# Altium PCB PCB1_AUTO.PcbDoc
Units mm, origin at the board's own origin, x right, y up, seen from the top; angles counter-clockwise.
Board outline 68.58 x 53.34 mm, 2 copper layers (Top Layer, Bottom Layer); 40 components, 28 nets, 191 pads, 26 vias.
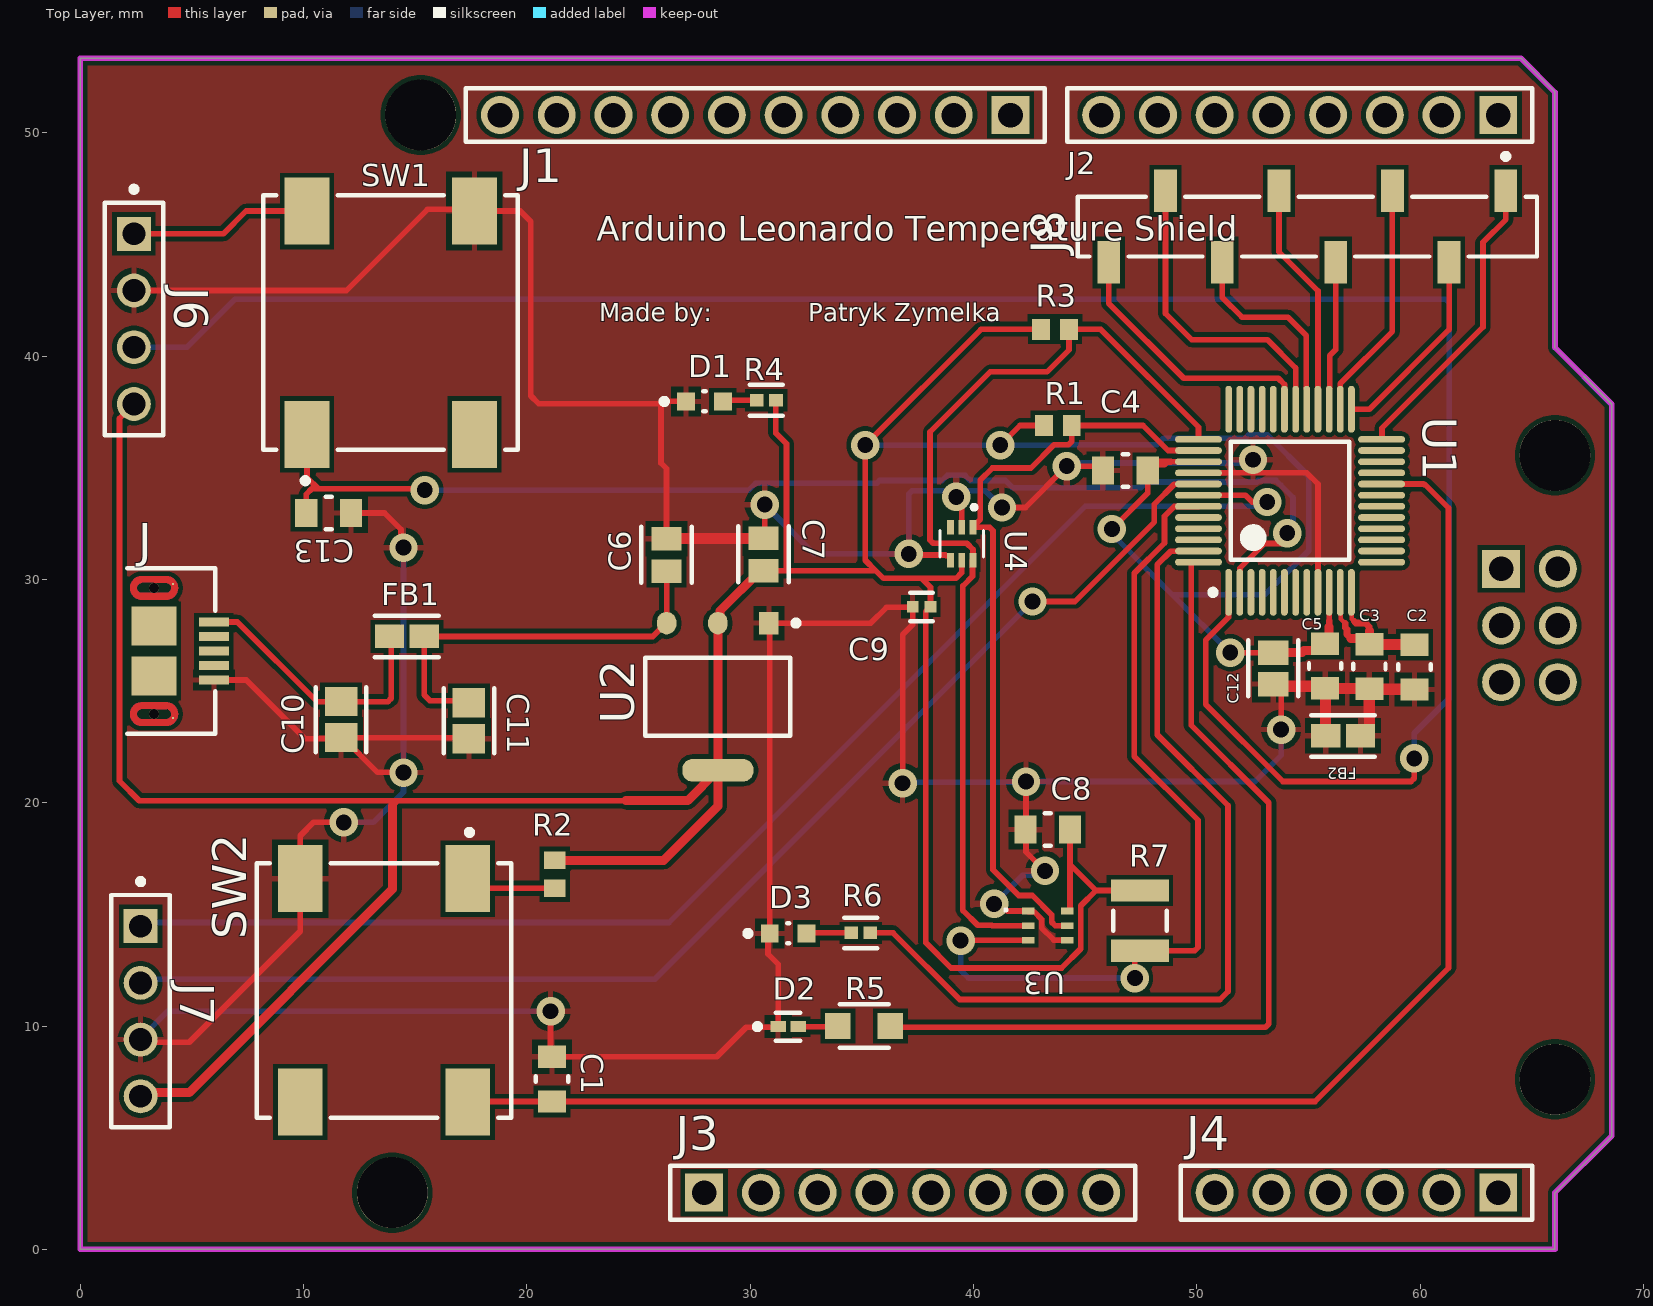
[diagram p0: Top Layer view]
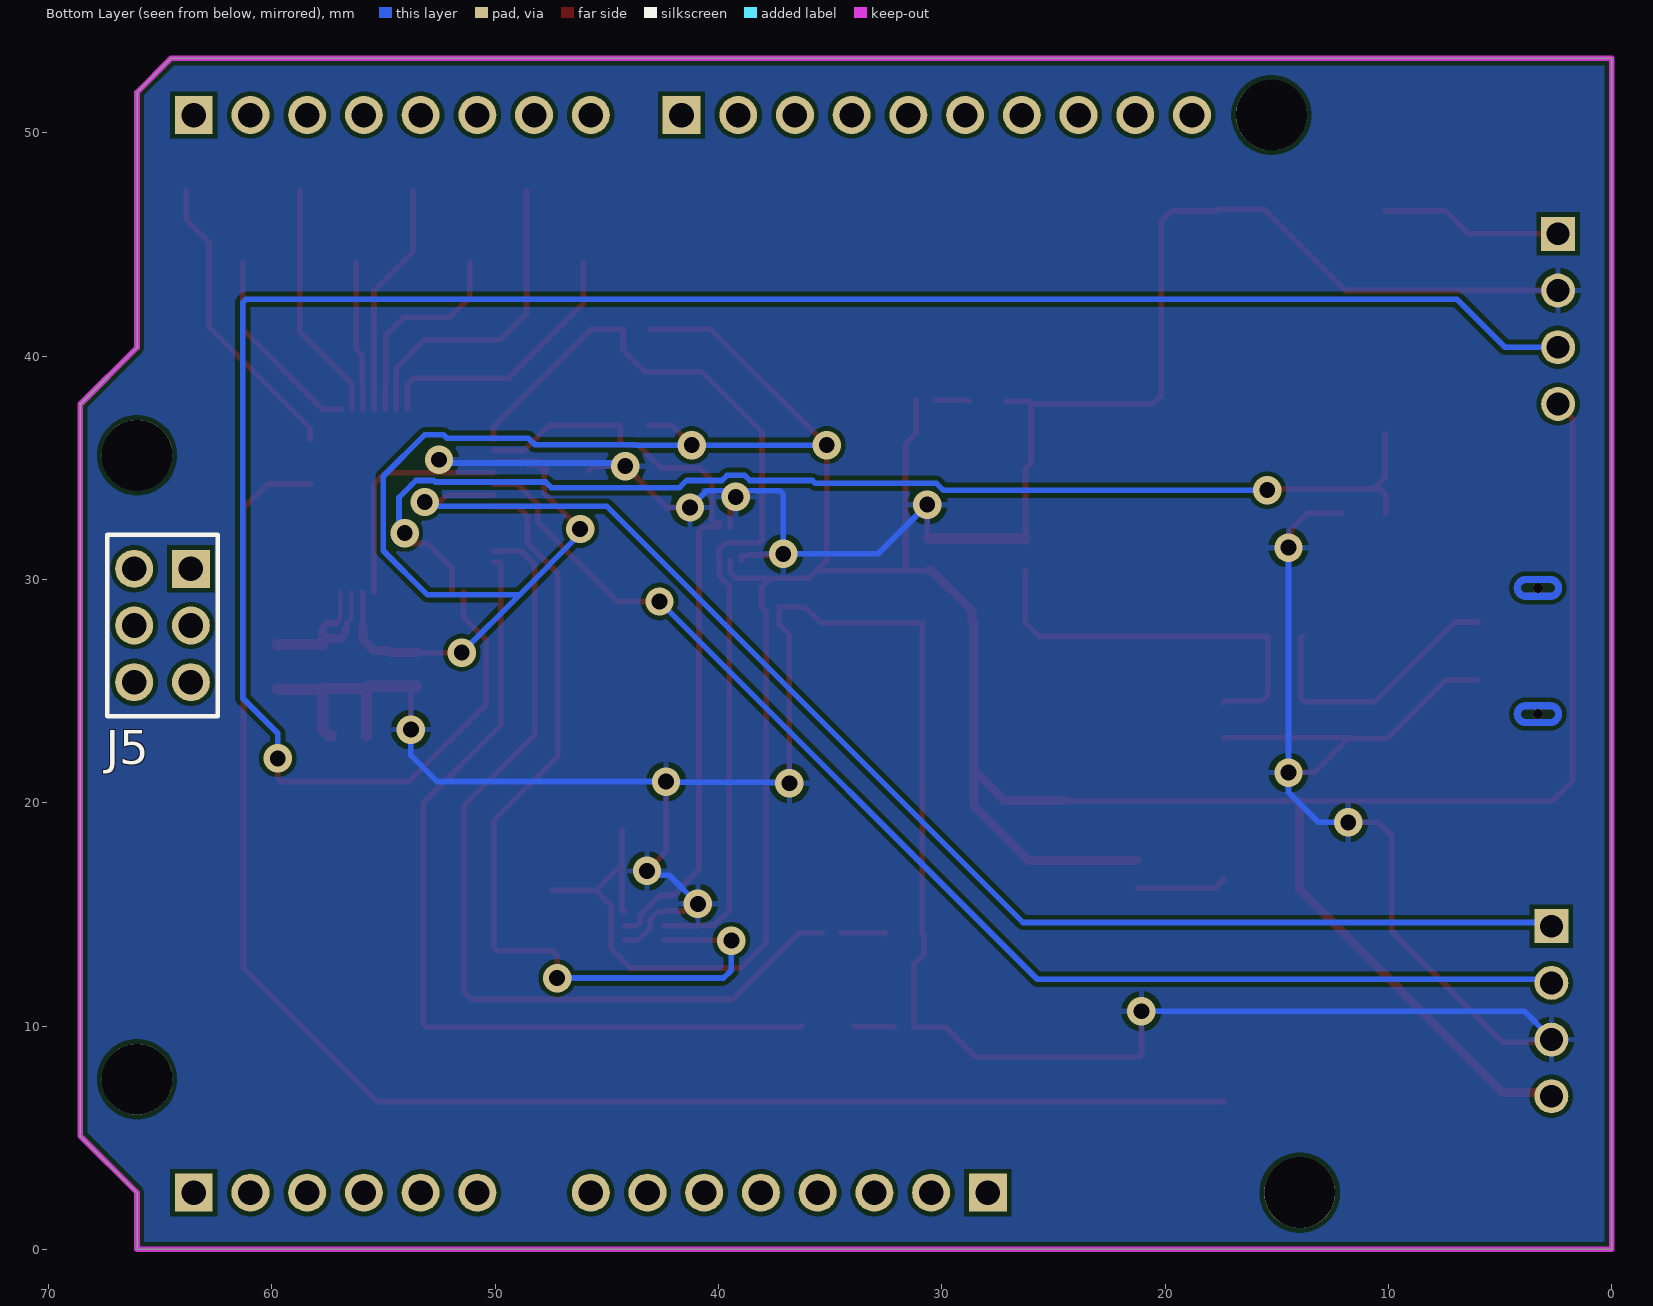
[diagram p1: Bottom Layer view, seen from below]
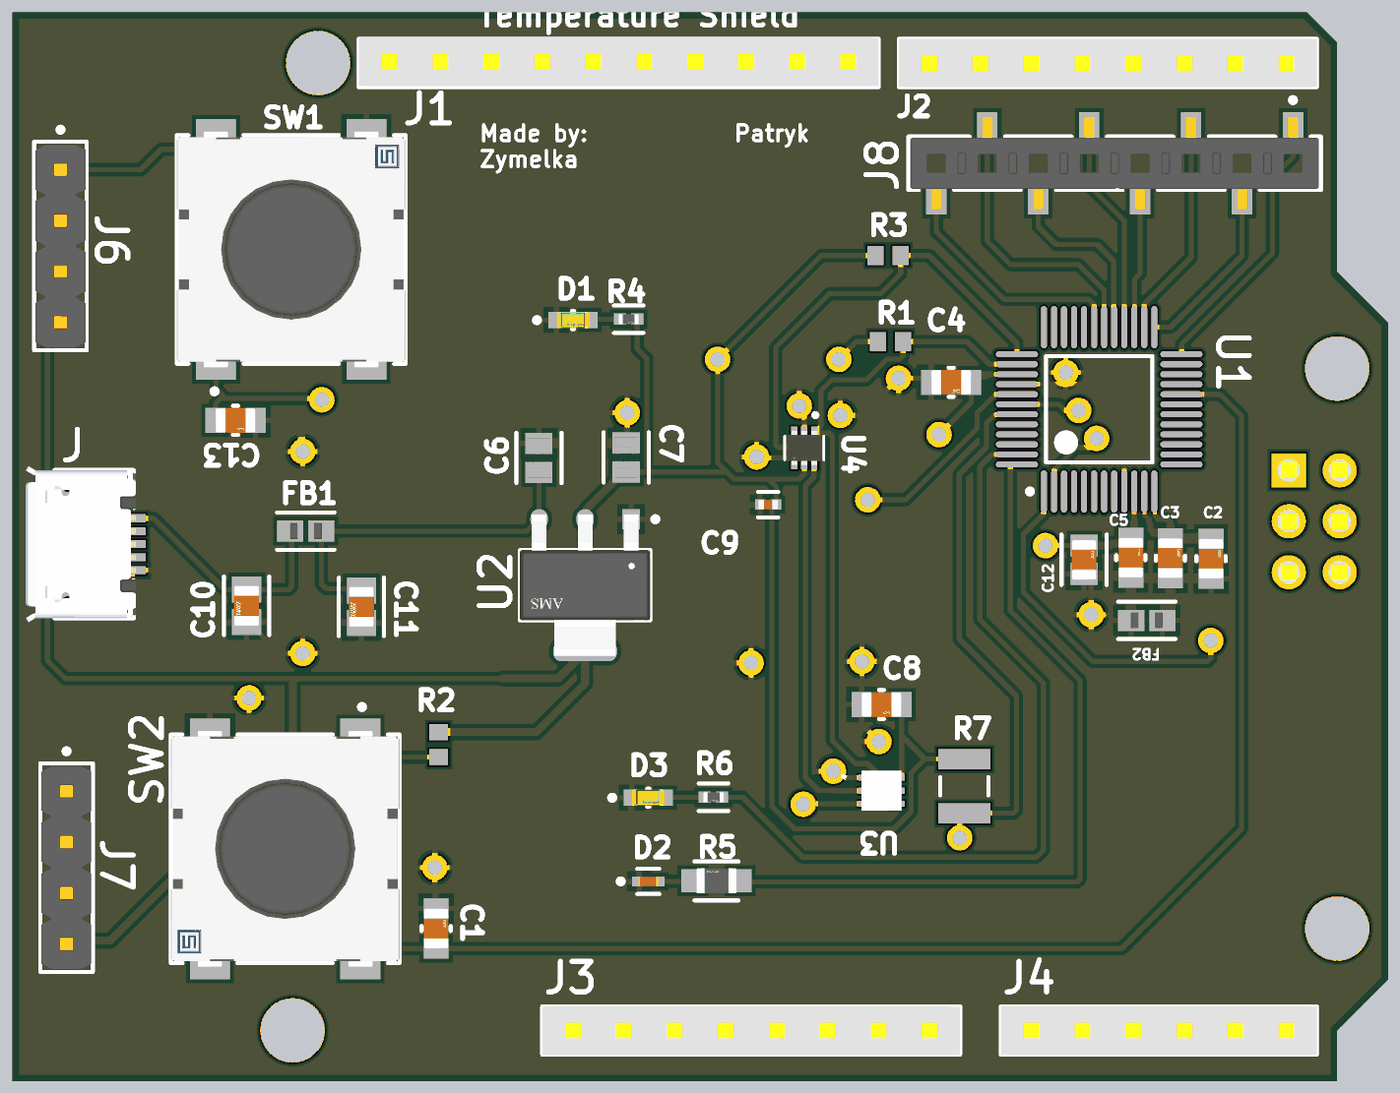
[diagram p2: 3D render of the assembled board from above, using the file's embedded part models]

## Layer stack, top to bottom
Top Solder: solder mask 0.0102, Solder Resist, Dk 3.5
Top Layer: signal copper 0.0356
Dielectric 1: dielectric 0.32, FR-4, Dk 4.8
Bottom Layer: signal copper 0.0356
Bottom Solder: solder mask 0.0102, Solder Resist, Dk 3.5

## Board outline
0,0 0,53.34 64.516,53.34 66.04,51.816 66.04,40.386 68.58,37.846 68.58,5.08 66.04,2.54 66.04,0

## Design rules (kind name [scope] priority, off if disabled: settings)
Clearance [All] p1: gap=0.2 ignorepadtopadclearanceinfootprint=FALSE except(0.18: SMDPad-SMDPad)
PolygonConnect [All] p1: connectstyle=Relief reliefconductorwidth=0.254 reliefentries=4 polygonreliefangle="90 Angle" airgapwidth=0.254
RoutingVias [All] p1: holewidth=0.711 width=1.27 viastyle="Through Hole" minholewidth=0.711 minwidth=1.27 maxholewidth=0.711 maxwidth=1.27
SolderMaskExpansion [All] p1: expansion=0.102 istentingtop=FALSE
Width [All] p1: maxlimit=0.5 minlimit=0.2 preferedwidth=0.254 minimp=50.000000 maximp=50.000000 favimp=50.000000
30 further rules are at their usual default settings.

## Components (designator, comment, footprint, x,y, rotation, side; value= is the part's Value field where it differs from the comment)
C1 "0805YC104KAT2A" FP-0805-L_2_01_0_2-W_1_25-MFG 21.125,7.625 r90 top
C2 "0805YC104KAT2A" FP-0805-L_2_01_0_2-W_1_25-MFG 59.75,26.075 r90 top
C3 "0805YC104KAT2A" FP-0805-L_2_01_0_2-W_1_25-MFG 57.725,26.1 r90 top
C4 "0805YC104KAT2A" FP-0805-L_2_01_0_2-W_1_25-MFG 46.8,34.875 r0 top
C5 "0805YC104KAT2A" FP-0805-L_2_01_0_2-W_1_25-MFG 55.75,26.125 r90 top
C6 "CL21A226MOCLRNC" FP-CL21-IPC_C 26.25,31.099 r90 top
C7 "CL21A226MOCLRNC" FP-CL21-IPC_C 30.6,31.124 r90 top
C8 "0805YC104KAT2A" FP-0805-L_2_01_0_2-W_1_25-MFG 43.325,18.8 r0 top
C9 "C0402C103M8RACTU" FP-C0402-BB-MFG 37.675,28.775 r180 top value="10,000 pF"
C10 "0805ZD225MAT2A" FP-0805-L_2_01_0_2-W_1_25-IPC_B 11.675,23.725 r270 top
C11 "0805ZD225MAT2A" FP-0805-L_2_01_0_2-W_1_25-IPC_B 17.4,23.675 r270 top
C12 "0805YC103KAT2A" FP-0805-L_2_01_0_2-W_1_25-IPC_C 53.425,26.019 r90 top
C13 "0805YC104KAT2A" FP-0805-L_2_01_0_2-W_1_25-MFG 11.125,32.975 r0 top
D1 "APT1608ZGCK" FP-APT1608ZGCK-MFG 27.95,37.975 r0 top
D2 "APHHS1005SURCK" FP-APHHS1005SURCK-MFG 31.7,9.975 r0 top
D3 "APT1608ZGCK" FP-APT1608ZGCK-MFG 31.7,14.15 r0 top
FB1 "BLM18KG121TN1D" FP-BLM18-0_15-t0_6-d1_2-IPC_A 14.625,27.45 r180 top
FB2 "BLM18KG121TN1D" FP-BLM18-0_15-t0_6-d1_2-IPC_A 56.55,23 r0 top
J "USB3080-XX-00-A_REVE" GCT_USB3080-XX-00-A_REVE 3.302,26.797 r270 top
J1 "SSW-110-03-T-S" SAMTEC_SSW-110-03-T-S 41.656,50.8 r180 top
J2 "SSW-108-03-T-S" SAMTEC_SSW-108-XX-X-S 54.61,50.8 r180 top
J3 "SSW-108-03-T-S" SAMTEC_SSW-108-XX-X-S 36.83,2.54 r0 top
J4 "SSW-106-03-T-S" SAMTEC_SSW-106-03-T-S 63.5,2.54 r180 top
J5 "SSW-103-03-T-D" SAMTEC_SSW-103-03-T-D 63.627,30.48 r90 bottom
J6 "MTLW-104-05-G-S-185" FP-MTLW-104-05-G-S-185-MFG 2.4,41.67 r270 top
J7 "MTLW-104-05-G-S-185" FP-MTLW-104-05-G-S-185-MFG 2.7,10.665 r270 top
J8 "SSM-108-S-SV" FP-SSM-108-S-SV-MFG 54.95,45.8 r180 top
R1 "CRCW06034K70FKTA" RESC1609X50X30NL10T20 43.775,36.9 r0 top
R2 "CRCW06034K70FKTA" RESC1609X50X30NL10T20 21.25,16.8 r270 top
R3 "CRCW06034K70FKTA" RESC1609X50X30NL10T20 43.65,41.2 r0 top
R4 "RC1005F331CS" FP-RC1005-IPC_B 30.721,38.025 r0 top
R5 "ERJ-6ENF1000V" FP-ERJ6EN-MFG 35.1,10 r0 top
R6 "RC1005F331CS" FP-RC1005-IPC_B 34.95,14.175 r0 top
R7 "CRCW121020K0FKTA" RESC3225X60X45LL20T20 47.45,14.725 r270 top
SW1 "1241.1613.23" FP-1241_1613_23-MFG 13.9,41.5 r90 top
SW2 "1241.1613.23" FP-1241_1613_23-MFG 13.6,11.6 r270 top
U1 "STM8L152C6T6" LQFP48_M 54.175,33.525 r90 top
U2 "AMS1117-3.3" FP-AMS1117-IPC_C 28.55,24.75 r270 top
U3 "VEML6030" VISHAY_VEML6030_2X2X0.87 43.325,14.5 r0 top
U4 "TMP1075NDRLR" SOT50P160X60-6N 39.475,31.6 r270 top

## Footprints (in the part's own frame and the unit in brackets; to place one, negate y for a bottom-side part, rotate by r counter-clockwise, add the part's x,y. Pads: shape width x height; smd on the part's side, far side on the other; paste and mask are expansions set on the pad)
FP-0805-L_2_01_0_2-W_1_25-IPC_B [mm]
  rect 1.305x1.456 smd paste+0 mask+0: 1(-0.806,0) 2(0.806,0)
  silkscreen extent -1.46,-1.13 1.46,1.13, body extent -1.71,-0.98 1.71,0.98, height 0.25
FP-0805-L_2_01_0_2-W_1_25-IPC_C [mm]
  rect 1.105x1.356 smd paste+0 mask+0: 1(-0.706,0) 2(0.706,0)
  silkscreen extent -1.26,-1.13 1.26,1.12, body extent -1.36,-0.82 1.36,0.82, height 0.25
FP-0805-L_2_01_0_2-W_1_25-MFG [mm]
  rect 1x1.25 smd paste+0 mask+0: 1(-1,0) 2(1,0)
  silkscreen extent -0.12,-0.72 0.12,0.72, body extent -1.6,-0.82 1.6,0.82, height 0.25
FP-1241_1613_23-MFG [mm]
  rect 3x2 smd paste+0 mask+0: 1(-5,3.75) 2(5,3.75) 3(-5,-3.75) 4(5,-3.75)
  silkscreen extent -7.2,-5.7 5.7,5.7, body extent -6.6,-5.8 6.6,5.8, height 0.25
FP-AMS1117-IPC_C [mm]
  rect 1.004x0.872 smd paste+0 mask+0: 1(-3.295,2.29)
  rrect100% 1.004x0.872 smd paste+0 mask+0: 2(-3.295,0) 3(-3.295,-2.29)
  rrect87% 1.004x3.182 smd paste+0 mask+0: 4(3.295,0)
  silkscreen extent -3.42,-3.25 1.75,3.63, body extent -3.9,-3.35 3.9,3.35, height 0.25
FP-APHHS1005SURCK-MFG [mm]
  rect 0.7x0.5 smd paste+0 mask+0: 1(-0.45,0) 2(0.45,0)
  silkscreen extent -1.5,-0.63 0.55,0.62, body extent -0.9,-0.4 0.9,0.4, height 0.25
FP-APT1608ZGCK-MFG [mm]
  rect 0.8x0.8 smd paste+0 mask+0: 1(-0.825,0) 2(0.825,0)
  silkscreen extent -1.92,-0.45 0.05,0.45, body extent -1.33,-0.55 1.33,0.55, height 0.25
FP-BLM18-0_15-t0_6-d1_2-IPC_A [mm]
  rect 1.306x1.058 smd paste+0 mask+0: 1(-0.776,0) 2(0.776,0)
  silkscreen extent -1.43,-0.93 1.43,0.93, body extent -1.93,-1.03 1.93,1.03, height 0.25
FP-C0402-BB-MFG [mm]
  rect 0.52x0.52 smd paste+0 mask+0: 1(-0.4,0) 2(0.4,0)
  silkscreen extent -0.5,-0.64 0.5,0.64, body extent -0.8,-0.4 0.8,0.4, height 0.25
FP-CL21-IPC_C [mm]
  rect 1.055x1.356 smd paste+0 mask+0: 1(-0.726,0) 2(0.726,0)
  silkscreen extent -1.25,-1.13 1.25,1.12, body extent -1.35,-0.82 1.35,0.82, height 0.25
FP-ERJ6EN-MFG [mm]
  rect 1.15x1.15 smd paste+0 mask+0: 1(-1.175,0) 2(1.175,0)
  silkscreen extent -1.1,-0.97 1.1,0.97, body extent -1.85,-0.77 1.85,0.77, height 0.25
FP-MTLW-104-05-G-S-185-MFG [mm]
  rect 1.52x1.52 hole 1.02 paste-2539.97 mask+0: 1(-3.81,0)
  round 1.52 hole 1.02 paste-2539.97 mask+0: 2(-1.27,0) 3(1.27,0) 4(3.81,0)
  silkscreen extent -5.93,-1.31 5.21,1.31, body extent -5.31,-1.41 5.31,1.41, height 0.25
FP-RC1005-IPC_B [mm]
  rect 0.615x0.572 smd paste+0 mask+0: 1(-0.429,0) 2(0.429,0)
  silkscreen extent -0.74,-0.69 0.74,0.69, body extent -0.89,-0.44 0.89,0.44, height 0.25
FP-SSM-108-S-SV-MFG [mm]
  rect 1.02x1.905 smd paste+0 mask+0: 1(-8.89,-1.602) 2(-6.35,1.602) 3(-3.81,-1.602) 4(-1.27,1.602) 5(1.27,-1.602) 6(3.81,1.602) 7(6.35,-1.602) 8(8.89,1.602)
  silkscreen extent -10.29,-3.27 10.29,1.34, body extent -10.45,-2.66 10.45,2.66, height 0.25
GCT_USB3080-XX-00-A_REVE [mm]
  rect 0.4x1.35 smd: 1(-1.3,2.68) 2(-0.65,2.68) 3(0,2.68) 4(0.65,2.68) 5(1.3,2.68)
  rect 0.1x0.1 smd paste-1 mask+0: 6(-3,0.85) 7(3,0.85)
  rect 1.75x2 smd: 8(-1.125,0) 9(1.125,0)
  round 0.45 hole 0.45 unplated: ""(-2.825,0) ""(2.825,0)
  Top Layer region: 3.35,-0.55 3.349,-0.577 3.347,-0.605 3.344,-0.632 3.339,-0.659 3.332,-0.686 3.324,-0.712 3.315,-0.738 3.305,-0.764 3.293,-0.788 3.28,-0.813 3.265,-0.836 3.25,-0.859 3.233,-0.88 3.215,-0.901 3.196,-0.921 3.176,-0.94 3.155,-0.958 3.134,-0.975 3.111,-0.99 3.087,-1.005 3.063,-1.018 3.039,-1.03 3.013,-1.04 2.987,-1.049 2.961,-1.057 2.934,-1.064 2.907,-1.069 2.88,-1.072 2.852,-1.074 2.825,-1.075 2.798,-1.074 2.77,-1.072 2.743,-1.069 2.716,-1.064 2.689,-1.057 2.663,-1.049 2.637,-1.04 2.611,-1.03 2.587,-1.018 2.562,-1.005 2.539,-0.99 2.516,-0.975 2.495,-0.958 2.474,-0.94 2.454,-0.921 2.435,-0.901 2.417,-0.88 2.4,-0.859 2.385,-0.836 2.37,-0.813 2.357,-0.788 2.345,-0.764 2.335,-0.738 2.326,-0.712 2.318,-0.686 2.311,-0.659 2.306,-0.632 2.303,-0.605 2.301,-0.577 2.3,-0.55 2.3,0 2.6,0 2.6,-0.55 2.6,-0.562 2.601,-0.574 2.603,-0.585 2.605,-0.597 2.608,-0.608 2.611,-0.62 2.615,-0.631 2.619,-0.642 2.625,-0.652 2.63,-0.663 2.636,-0.673 2.643,-0.682 2.65,-0.692 2.658,-0.701 2.666,-0.709 2.674,-0.717 2.683,-0.725 2.693,-0.732 2.702,-0.739 2.712,-0.745 2.723,-0.75 2.733,-0.756 2.744,-0.76 2.755,-0.764 2.767,-0.767 2.778,-0.77 2.79,-0.772 2.801,-0.774 2.813,-0.775 2.825,-0.775 2.837,-0.775 2.849,-0.774 2.86,-0.772 2.872,-0.77 2.883,-0.767 2.895,-0.764 2.906,-0.76 2.917,-0.756 2.927,-0.75 2.937,-0.745 2.948,-0.739 2.957,-0.732 2.967,-0.725 2.976,-0.717 2.984,-0.709 2.992,-0.701 3,-0.692 3.007,-0.682 3.014,-0.673 3.02,-0.663 3.025,-0.652 3.031,-0.642 3.035,-0.631 3.039,-0.62 3.042,-0.608 3.045,-0.597 3.047,-0.585 3.049,-0.574 3.05,-0.562 3.05,-0.55 3.05,0 3.35,0
  Top Layer region: 2.852,1.074 2.88,1.072 2.907,1.069 2.934,1.064 2.961,1.057 2.987,1.049 3.013,1.04 3.039,1.03 3.063,1.018 3.087,1.005 3.111,0.99 3.134,0.975 3.155,0.958 3.176,0.94 3.196,0.921 3.215,0.901 3.233,0.88 3.25,0.859 3.265,0.836 3.28,0.813 3.293,0.788 3.305,0.764 3.315,0.738 3.324,0.712 3.332,0.686 3.339,0.659 3.344,0.632 3.347,0.605 3.349,0.577 3.35,0.55 3.35,0 3.05,0 3.05,0.55 3.05,0.562 3.049,0.574 3.047,0.585 3.045,0.597 3.042,0.608 3.039,0.62 3.035,0.631 3.031,0.642 3.025,0.652 3.02,0.663 3.014,0.673 3.007,0.682 3,0.692 2.992,0.701 2.984,0.709 2.976,0.717 2.967,0.725 2.957,0.732 2.948,0.739 2.937,0.745 2.927,0.75 2.917,0.756 2.906,0.76 2.895,0.764 2.883,0.767 2.872,0.77 2.86,0.772 2.849,0.774 2.837,0.775 2.825,0.775 2.813,0.775 2.801,0.774 2.79,0.772 2.778,0.77 2.767,0.767 2.755,0.764 2.744,0.76 2.733,0.756 2.723,0.75 2.712,0.745 2.702,0.739 2.693,0.732 2.683,0.725 2.674,0.717 2.666,0.709 2.658,0.701 2.65,0.692 2.643,0.682 2.636,0.673 2.63,0.663 2.625,0.652 2.619,0.642 2.615,0.631 2.611,0.62 2.608,0.608 2.605,0.597 2.603,0.585 2.601,0.574 2.6,0.562 2.6,0.55 2.6,0 2.3,0 2.3,0.55 2.301,0.577 2.303,0.605 2.306,0.632 2.311,0.659 2.318,0.686 2.326,0.712 2.335,0.738 2.345,0.764 2.357,0.788 2.37,0.813 2.385,0.836 2.4,0.859 2.417,0.88 2.435,0.901 2.454,0.921 2.474,0.94 2.495,0.958 2.516,0.975 2.539,0.99 2.562,1.005 2.587,1.018 2.611,1.03 2.637,1.04 2.663,1.049 2.689,1.057 2.716,1.064 2.743,1.069 2.77,1.072 2.798,1.074 2.825,1.075
  Top Layer region: -2.3,-0.55 -2.301,-0.577 -2.303,-0.605 -2.306,-0.632 -2.311,-0.659 -2.318,-0.686 -2.326,-0.712 -2.335,-0.738 -2.345,-0.764 -2.357,-0.788 -2.37,-0.813 -2.385,-0.836 -2.4,-0.859 -2.417,-0.88 -2.435,-0.901 -2.454,-0.921 -2.474,-0.94 -2.495,-0.958 -2.516,-0.975 -2.539,-0.99 -2.562,-1.005 -2.587,-1.018 -2.611,-1.03 -2.637,-1.04 -2.663,-1.049 -2.689,-1.057 -2.716,-1.064 -2.743,-1.069 -2.77,-1.072 -2.798,-1.074 -2.825,-1.075 -2.852,-1.074 -2.88,-1.072 -2.907,-1.069 -2.934,-1.064 -2.961,-1.057 -2.987,-1.049 -3.013,-1.04 -3.039,-1.03 -3.063,-1.018 -3.087,-1.005 -3.111,-0.99 -3.134,-0.975 -3.155,-0.958 -3.176,-0.94 -3.196,-0.921 -3.215,-0.901 -3.233,-0.88 -3.25,-0.859 -3.265,-0.836 -3.28,-0.813 -3.293,-0.788 -3.305,-0.764 -3.315,-0.738 -3.324,-0.712 -3.332,-0.686 -3.339,-0.659 -3.344,-0.632 -3.347,-0.605 -3.349,-0.577 -3.35,-0.55 -3.35,0 -3.05,0 -3.05,-0.55 -3.05,-0.562 -3.049,-0.574 -3.047,-0.585 -3.045,-0.597 -3.042,-0.608 -3.039,-0.62 -3.035,-0.631 -3.031,-0.642 -3.025,-0.652 -3.02,-0.663 -3.014,-0.673 -3.007,-0.682 -3,-0.692 -2.992,-0.701 -2.984,-0.709 -2.976,-0.717 -2.967,-0.725 -2.957,-0.732 -2.948,-0.739 -2.937,-0.745 -2.927,-0.75 -2.917,-0.756 -2.906,-0.76 -2.895,-0.764 -2.883,-0.767 -2.872,-0.77 -2.86,-0.772 -2.849,-0.774 -2.837,-0.775 -2.825,-0.775 -2.813,-0.775 -2.801,-0.774 -2.79,-0.772 -2.778,-0.77 -2.767,-0.767 -2.755,-0.764 -2.744,-0.76 -2.733,-0.756 -2.723,-0.75 -2.712,-0.745 -2.702,-0.739 -2.693,-0.732 -2.683,-0.725 -2.674,-0.717 -2.666,-0.709 -2.658,-0.701 -2.65,-0.692 -2.643,-0.682 -2.636,-0.673 -2.63,-0.663 -2.625,-0.652 -2.619,-0.642 -2.615,-0.631 -2.611,-0.62 -2.608,-0.608 -2.605,-0.597 -2.603,-0.585 -2.601,-0.574 -2.6,-0.562 -2.6,-0.55 -2.6,0 -2.3,0
  Top Layer region: -2.798,1.074 -2.77,1.072 -2.743,1.069 -2.716,1.064 -2.689,1.057 -2.663,1.049 -2.637,1.04 -2.611,1.03 -2.587,1.018 -2.562,1.005 -2.539,0.99 -2.516,0.975 -2.495,0.958 -2.474,0.94 -2.454,0.921 -2.435,0.901 -2.417,0.88 -2.4,0.859 -2.385,0.836 -2.37,0.813 -2.357,0.788 -2.345,0.764 -2.335,0.738 -2.326,0.712 -2.318,0.686 -2.311,0.659 -2.306,0.632 -2.303,0.605 -2.301,0.577 -2.3,0.55 -2.3,0 -2.6,0 -2.6,0.55 -2.6,0.562 -2.601,0.574 -2.603,0.585 -2.605,0.597 -2.608,0.608 -2.611,0.62 -2.615,0.631 -2.619,0.642 -2.625,0.652 -2.63,0.663 -2.636,0.673 -2.643,0.682 -2.65,0.692 -2.658,0.701 -2.666,0.709 -2.674,0.717 -2.683,0.725 -2.693,0.732 -2.702,0.739 -2.712,0.745 -2.723,0.75 -2.733,0.756 -2.744,0.76 -2.755,0.764 -2.767,0.767 -2.778,0.77 -2.79,0.772 -2.801,0.774 -2.813,0.775 -2.825,0.775 -2.837,0.775 -2.849,0.774 -2.86,0.772 -2.872,0.77 -2.883,0.767 -2.895,0.764 -2.906,0.76 -2.917,0.756 -2.927,0.75 -2.937,0.745 -2.948,0.739 -2.957,0.732 -2.967,0.725 -2.976,0.717 -2.984,0.709 -2.992,0.701 -3,0.692 -3.007,0.682 -3.014,0.673 -3.02,0.663 -3.025,0.652 -3.031,0.642 -3.035,0.631 -3.039,0.62 -3.042,0.608 -3.045,0.597 -3.047,0.585 -3.049,0.574 -3.05,0.562 -3.05,0.55 -3.05,0 -3.35,0 -3.35,0.55 -3.349,0.577 -3.347,0.605 -3.344,0.632 -3.339,0.659 -3.332,0.686 -3.324,0.712 -3.315,0.738 -3.305,0.764 -3.293,0.788 -3.28,0.813 -3.265,0.836 -3.25,0.859 -3.233,0.88 -3.215,0.901 -3.196,0.921 -3.176,0.94 -3.155,0.958 -3.134,0.975 -3.111,0.99 -3.087,1.005 -3.063,1.018 -3.039,1.03 -3.013,1.04 -2.987,1.049 -2.961,1.057 -2.934,1.064 -2.907,1.069 -2.88,1.072 -2.852,1.074 -2.825,1.075
  Bottom Layer region: 3.35,-0.55 3.349,-0.577 3.347,-0.605 3.344,-0.632 3.339,-0.659 3.332,-0.686 3.324,-0.712 3.315,-0.738 3.305,-0.764 3.293,-0.788 3.28,-0.813 3.265,-0.836 3.25,-0.859 3.233,-0.88 3.215,-0.901 3.196,-0.921 3.176,-0.94 3.155,-0.958 3.134,-0.975 3.111,-0.99 3.087,-1.005 3.063,-1.018 3.039,-1.03 3.013,-1.04 2.987,-1.049 2.961,-1.057 2.934,-1.064 2.907,-1.069 2.88,-1.072 2.852,-1.074 2.825,-1.075 2.798,-1.074 2.77,-1.072 2.743,-1.069 2.716,-1.064 2.689,-1.057 2.663,-1.049 2.637,-1.04 2.611,-1.03 2.587,-1.018 2.562,-1.005 2.539,-0.99 2.516,-0.975 2.495,-0.958 2.474,-0.94 2.454,-0.921 2.435,-0.901 2.417,-0.88 2.4,-0.859 2.385,-0.836 2.37,-0.813 2.357,-0.788 2.345,-0.764 2.335,-0.738 2.326,-0.712 2.318,-0.686 2.311,-0.659 2.306,-0.632 2.303,-0.605 2.301,-0.577 2.3,-0.55 2.3,0 2.6,0 2.6,-0.55 2.6,-0.562 2.601,-0.574 2.603,-0.585 2.605,-0.597 2.608,-0.608 2.611,-0.62 2.615,-0.631 2.619,-0.642 2.625,-0.652 2.63,-0.663 2.636,-0.673 2.643,-0.682 2.65,-0.692 2.658,-0.701 2.666,-0.709 2.674,-0.717 2.683,-0.725 2.693,-0.732 2.702,-0.739 2.712,-0.745 2.723,-0.75 2.733,-0.756 2.744,-0.76 2.755,-0.764 2.767,-0.767 2.778,-0.77 2.79,-0.772 2.801,-0.774 2.813,-0.775 2.825,-0.775 2.837,-0.775 2.849,-0.774 2.86,-0.772 2.872,-0.77 2.883,-0.767 2.895,-0.764 2.906,-0.76 2.917,-0.756 2.927,-0.75 2.937,-0.745 2.948,-0.739 2.957,-0.732 2.967,-0.725 2.976,-0.717 2.984,-0.709 2.992,-0.701 3,-0.692 3.007,-0.682 3.014,-0.673 3.02,-0.663 3.025,-0.652 3.031,-0.642 3.035,-0.631 3.039,-0.62 3.042,-0.608 3.045,-0.597 3.047,-0.585 3.049,-0.574 3.05,-0.562 3.05,-0.55 3.05,0 3.35,0
  Bottom Layer region: 2.852,1.074 2.88,1.072 2.907,1.069 2.934,1.064 2.961,1.057 2.987,1.049 3.013,1.04 3.039,1.03 3.063,1.018 3.087,1.005 3.111,0.99 3.134,0.975 3.155,0.958 3.176,0.94 3.196,0.921 3.215,0.901 3.233,0.88 3.25,0.859 3.265,0.836 3.28,0.813 3.293,0.788 3.305,0.764 3.315,0.738 3.324,0.712 3.332,0.686 3.339,0.659 3.344,0.632 3.347,0.605 3.349,0.577 3.35,0.55 3.35,0 3.05,0 3.05,0.55 3.05,0.562 3.049,0.574 3.047,0.585 3.045,0.597 3.042,0.608 3.039,0.62 3.035,0.631 3.031,0.642 3.025,0.652 3.02,0.663 3.014,0.673 3.007,0.682 3,0.692 2.992,0.701 2.984,0.709 2.976,0.717 2.967,0.725 2.957,0.732 2.948,0.739 2.937,0.745 2.927,0.75 2.917,0.756 2.906,0.76 2.895,0.764 2.883,0.767 2.872,0.77 2.86,0.772 2.849,0.774 2.837,0.775 2.825,0.775 2.813,0.775 2.801,0.774 2.79,0.772 2.778,0.77 2.767,0.767 2.755,0.764 2.744,0.76 2.733,0.756 2.723,0.75 2.712,0.745 2.702,0.739 2.693,0.732 2.683,0.725 2.674,0.717 2.666,0.709 2.658,0.701 2.65,0.692 2.643,0.682 2.636,0.673 2.63,0.663 2.625,0.652 2.619,0.642 2.615,0.631 2.611,0.62 2.608,0.608 2.605,0.597 2.603,0.585 2.601,0.574 2.6,0.562 2.6,0.55 2.6,0 2.3,0 2.3,0.55 2.301,0.577 2.303,0.605 2.306,0.632 2.311,0.659 2.318,0.686 2.326,0.712 2.335,0.738 2.345,0.764 2.357,0.788 2.37,0.813 2.385,0.836 2.4,0.859 2.417,0.88 2.435,0.901 2.454,0.921 2.474,0.94 2.495,0.958 2.516,0.975 2.539,0.99 2.562,1.005 2.587,1.018 2.611,1.03 2.637,1.04 2.663,1.049 2.689,1.057 2.716,1.064 2.743,1.069 2.77,1.072 2.798,1.074 2.825,1.075
  Bottom Layer region: -2.3,-0.55 -2.301,-0.577 -2.303,-0.605 -2.306,-0.632 -2.311,-0.659 -2.318,-0.686 -2.326,-0.712 -2.335,-0.738 -2.345,-0.764 -2.357,-0.788 -2.37,-0.813 -2.385,-0.836 -2.4,-0.859 -2.417,-0.88 -2.435,-0.901 -2.454,-0.921 -2.474,-0.94 -2.495,-0.958 -2.516,-0.975 -2.539,-0.99 -2.562,-1.005 -2.587,-1.018 -2.611,-1.03 -2.637,-1.04 -2.663,-1.049 -2.689,-1.057 -2.716,-1.064 -2.743,-1.069 -2.77,-1.072 -2.798,-1.074 -2.825,-1.075 -2.852,-1.074 -2.88,-1.072 -2.907,-1.069 -2.934,-1.064 -2.961,-1.057 -2.987,-1.049 -3.013,-1.04 -3.039,-1.03 -3.063,-1.018 -3.087,-1.005 -3.111,-0.99 -3.134,-0.975 -3.155,-0.958 -3.176,-0.94 -3.196,-0.921 -3.215,-0.901 -3.233,-0.88 -3.25,-0.859 -3.265,-0.836 -3.28,-0.813 -3.293,-0.788 -3.305,-0.764 -3.315,-0.738 -3.324,-0.712 -3.332,-0.686 -3.339,-0.659 -3.344,-0.632 -3.347,-0.605 -3.349,-0.577 -3.35,-0.55 -3.35,0 -3.05,0 -3.05,-0.55 -3.05,-0.562 -3.049,-0.574 -3.047,-0.585 -3.045,-0.597 -3.042,-0.608 -3.039,-0.62 -3.035,-0.631 -3.031,-0.642 -3.025,-0.652 -3.02,-0.663 -3.014,-0.673 -3.007,-0.682 -3,-0.692 -2.992,-0.701 -2.984,-0.709 -2.976,-0.717 -2.967,-0.725 -2.957,-0.732 -2.948,-0.739 -2.937,-0.745 -2.927,-0.75 -2.917,-0.756 -2.906,-0.76 -2.895,-0.764 -2.883,-0.767 -2.872,-0.77 -2.86,-0.772 -2.849,-0.774 -2.837,-0.775 -2.825,-0.775 -2.813,-0.775 -2.801,-0.774 -2.79,-0.772 -2.778,-0.77 -2.767,-0.767 -2.755,-0.764 -2.744,-0.76 -2.733,-0.756 -2.723,-0.75 -2.712,-0.745 -2.702,-0.739 -2.693,-0.732 -2.683,-0.725 -2.674,-0.717 -2.666,-0.709 -2.658,-0.701 -2.65,-0.692 -2.643,-0.682 -2.636,-0.673 -2.63,-0.663 -2.625,-0.652 -2.619,-0.642 -2.615,-0.631 -2.611,-0.62 -2.608,-0.608 -2.605,-0.597 -2.603,-0.585 -2.601,-0.574 -2.6,-0.562 -2.6,-0.55 -2.6,0 -2.3,0
  Bottom Layer region: -2.798,1.074 -2.77,1.072 -2.743,1.069 -2.716,1.064 -2.689,1.057 -2.663,1.049 -2.637,1.04 -2.611,1.03 -2.587,1.018 -2.562,1.005 -2.539,0.99 -2.516,0.975 -2.495,0.958 -2.474,0.94 -2.454,0.921 -2.435,0.901 -2.417,0.88 -2.4,0.859 -2.385,0.836 -2.37,0.813 -2.357,0.788 -2.345,0.764 -2.335,0.738 -2.326,0.712 -2.318,0.686 -2.311,0.659 -2.306,0.632 -2.303,0.605 -2.301,0.577 -2.3,0.55 -2.3,0 -2.6,0 -2.6,0.55 -2.6,0.562 -2.601,0.574 -2.603,0.585 -2.605,0.597 -2.608,0.608 -2.611,0.62 -2.615,0.631 -2.619,0.642 -2.625,0.652 -2.63,0.663 -2.636,0.673 -2.643,0.682 -2.65,0.692 -2.658,0.701 -2.666,0.709 -2.674,0.717 -2.683,0.725 -2.693,0.732 -2.702,0.739 -2.712,0.745 -2.723,0.75 -2.733,0.756 -2.744,0.76 -2.755,0.764 -2.767,0.767 -2.778,0.77 -2.79,0.772 -2.801,0.774 -2.813,0.775 -2.825,0.775 -2.837,0.775 -2.849,0.774 -2.86,0.772 -2.872,0.77 -2.883,0.767 -2.895,0.764 -2.906,0.76 -2.917,0.756 -2.927,0.75 -2.937,0.745 -2.948,0.739 -2.957,0.732 -2.967,0.725 -2.976,0.717 -2.984,0.709 -2.992,0.701 -3,0.692 -3.007,0.682 -3.014,0.673 -3.02,0.663 -3.025,0.652 -3.031,0.642 -3.035,0.631 -3.039,0.62 -3.042,0.608 -3.045,0.597 -3.047,0.585 -3.049,0.574 -3.05,0.562 -3.05,0.55 -3.05,0 -3.35,0 -3.35,0.55 -3.349,0.577 -3.347,0.605 -3.344,0.632 -3.339,0.659 -3.332,0.686 -3.324,0.712 -3.315,0.738 -3.305,0.764 -3.293,0.788 -3.28,0.813 -3.265,0.836 -3.25,0.859 -3.233,0.88 -3.215,0.901 -3.196,0.921 -3.176,0.94 -3.155,0.958 -3.134,0.975 -3.111,0.99 -3.087,1.005 -3.063,1.018 -3.039,1.03 -3.013,1.04 -2.987,1.049 -2.961,1.057 -2.934,1.064 -2.907,1.069 -2.88,1.072 -2.852,1.074 -2.825,1.075
  silkscreen extent -3.7,-1.2 3.7,2.75, body extent -3.9,-2.64 3.9,2.86, height 2.54
LQFP48_M [mm] "Thin QFP, 48-Leads, Body 7x7mm, Pitch 0.5mm, IPC Low Density"
  oval 2.1x0.3 smd: 1(-4.1,2.75) 2(-4.1,2.25) 3(-4.1,1.75) 4(-4.1,1.25) 5(-4.1,0.75) 6(-4.1,0.25) 7(-4.1,-0.25) 8(-4.1,-0.75) 9(-4.1,-1.25) 10(-4.1,-1.75) 11(-4.1,-2.25) 12(-4.1,-2.75) 25(4.1,-2.75) 26(4.1,-2.25) 27(4.1,-1.75) 28(4.1,-1.25) 29(4.1,-0.75) 30(4.1,-0.25) 31(4.1,0.25) 32(4.1,0.75) 33(4.1,1.25) 34(4.1,1.75) 35(4.1,2.25) 36(4.1,2.75)
  oval 0.3x2.1 smd: 13(-2.75,-4.1) 14(-2.25,-4.1) 15(-1.75,-4.1) 16(-1.25,-4.1) 17(-0.75,-4.1) 18(-0.25,-4.1) 19(0.25,-4.1) 20(0.75,-4.1) 21(1.25,-4.1) 22(1.75,-4.1) 23(2.25,-4.1) 24(2.75,-4.1) 37(2.75,4.1) 38(2.25,4.1) 39(1.75,4.1) 40(1.25,4.1) 41(0.75,4.1) 42(0.25,4.1) 43(-0.25,4.1) 44(-0.75,4.1) 45(-1.25,4.1) 46(-1.75,4.1) 47(-2.25,4.1) 48(-2.75,4.1)
  silkscreen extent -4.22,-2.65 2.65,3.57, body extent -3.5,-3.5 3.5,3.5, height 1.6
RESC1609X50X30NL10T20 [mm] "Chip Resistor, 2-Leads, Body 1.55x0.85mm, IPC Medium Density"
  rect 0.8x0.95 smd: 1(-0.625,0) 2(0.625,0)
  body extent -0.82,-0.48 0.82,0.48, height 0.5
RESC3225X60X45LL20T20 [mm] "Chip Resistor, 2-Leads, Body 3.20x2.50mm, IPC High Density"
  rect 1x2.6 smd: 1(-1.35,0) 2(1.35,0)
  silkscreen extent -0.45,-1.2 0.45,1.2, body extent -1.7,-1.35 1.7,1.35, height 0.6
SAMTEC_SSW-103-03-T-D [mm]
  rect 1.7x1.7 hole 1.1: 01(0,0)
  round 1.7 hole 1.1: 02(0,2.54) 03(-2.54,0) 04(-2.54,2.54) 05(-5.08,0) 06(-5.08,2.54)
  silkscreen extent -6.61,-1.21 1.53,3.75, body extent -6.6,-1.21 1.52,3.75, height 8.52
SAMTEC_SSW-106-03-T-S [mm]
  rect 1.7x1.7 hole 1.1: 01(0,0)
  round 1.7 hole 1.1: 02(2.54,0) 03(5.08,0) 04(7.62,0) 05(10.16,0) 06(12.7,0)
  silkscreen extent -1.53,-1.21 14.23,1.21, body extent -1.52,-1.21 14.22,1.21, height 8.52
SAMTEC_SSW-108-XX-X-S [mm]
  rect 1.7x1.7 hole 1.1: 01(-8.89,0)
  round 1.7 hole 1.1: 02(-6.35,0) 03(-3.81,0) 04(-1.27,0) 05(1.27,0) 06(3.81,0) 07(6.35,0) 08(8.89,0)
  silkscreen extent -10.42,-1.2 10.42,1.2, body extent -10.41,-1.21 10.41,1.21, height 8.52
SAMTEC_SSW-110-03-T-S [mm]
  rect 1.7x1.7 hole 1.1: 01(0,0)
  round 1.7 hole 1.1: 02(2.54,0) 03(5.08,0) 04(7.62,0) 05(10.16,0) 06(12.7,0) 07(15.24,0) 08(17.78,0) 09(20.32,0) 10(22.86,0)
  silkscreen extent -1.53,-1.21 24.39,1.21, body extent -1.52,-1.27 24.38,1.14, height 8.52
SOT50P160X60-6N [mm]
  rect 0.66x0.31 smd: 1(-0.735,0.5) 2(-0.735,0) 3(-0.735,-0.5) 4(0.735,-0.5) 5(0.735,0) 6(0.735,0.5)
  silkscreen extent -1.73,-0.98 0.6,0.97, body extent -0.85,-0.85 0.85,0.85, height 0.61
VISHAY_VEML6030_2X2X0.87 [mm]
  rect 0.55x0.3 smd: 1(-0.875,0.65) 2(-0.875,0) 3(-0.875,-0.65) 4(0.875,-0.65) 5(0.875,0) 6(0.875,0.65)
  silkscreen extent -1.92,0.65 -1.82,0.75, body extent -1,-1 1,1, height 0.87

## Part data
C1 C2 C3 C4 C5 C8 C13: library part CMP-2007-04454-2, "General Purpose Ceramic Capacitor, 0805, 100nF, 10%, X7R, 0.15, 16V", Capacitance=100nF, Case Code (Imperial)=0805, Case Code (Metric)=2012, Dielectric=X7R, Insulation Resistance=100GR, Max Operating Temperature=125°C, Min Operating Temperature=-55°C, Package Quantity=1, Tolerance=10%, Voltage Rating=16V, Case/Package=0805, Construction=Flat, Depth=1.25mm, Dissipation Factor=12.5%, Lead Free="Lead Free", Length=2.01mm, Mount="Surface Mount", Number of Pins=2, Packaging="Tape and Reel", Radiation Hardening=No, REACH SVHC="No SVHC", RoHS Compliant=Yes, Series=-, Termination=SMD/SMT, Thickness=0.037inch, Voltage Rating (DC)=16V, Width=0.049inch
C6 C7: library part CMP-13271-002990-1, "CL21 Series 0805 22uF 16V ±20% Tolerance X5R Multilayer Ceramic Chip Capacitor", Capacitance=22uF, Case Code (Imperial)=0805, Case Code (Metric)=2012, Max Operating Temperature=85°C, Min Operating Temperature=-55°C, Tolerance=20%, Voltage Rating=16V, Case/Package=0805, Length=0.079inch, Mount="Surface Mount", Packaging="Tape and Reel", Thickness=0.037inch, Width=0.049inch
C9: library part CMP-2008-03079-2, "CAP CER 10000PF 10V X7R 0402", Capacitance="10,000 pF", Manufacturer=Kemet, Package=C0402-BB, Temperature="-55°C to +125°C", Temperature Characteristic=X7R, Temperature Coefficient=15%, Temperature Range High=+125°C, Temperature Range Low=-55°C, Tolerance=0.2, Voltage Rating="10 V", Automotive=No, Category=Cap, ComponentLink2Description=Datasheet, ComponentLink2URL=https://content.kemet.com/datasheets/KEM_C1002_X7R_SMD.pdf, Device Class L1="Passive Components", Device Class L2=Capacitors, Device Class L3="Ceramic Capacitors", Digikey Description="CAP CER 10000PF 10V X7R 0402", Height=0.55mm, Ipc Land Pattern Name=CAPC10050X50, Lead Free=Yes, Manufacturer Part Number=C0402C103M8RACTU, Material=Ceramic, Mouser Description="Multilayer Ceramic Capacitors MLCC - SMD/SMT 10volts 10000pF X7R 20%", Octopart=https://octopart.com/c0402c103m8ractu-kemet-12595671, RoHS=TRUE
C10 C11: library part CMP-2007-04684-2, "General Purpose Ceramic Capacitor, 0805, 2.2uF, 20%, X5R, 15%, 10V", Capacitance=2.2uF, Case Code (Imperial)=0805, Case Code (Metric)=2012, Dielectric=X5R, Max Operating Temperature=85°C, Min Operating Temperature=-55°C, Package Quantity=1, Tolerance=20%, Voltage Rating=10V, Case/Package=0805, Construction=Flat, Depth=1.25mm, Dissipation Factor=5%, Height=1.4mm, Lead Free="Lead Free", Length=2.01mm, Mount="Surface Mount", Number of Pins=2, Packaging="Tape and Reel", Radiation Hardening=No, REACH SVHC="No SVHC", RoHS Compliant=Yes, Series=-, Termination=SMD/SMT, Thickness=0.055inch, Voltage Rating (DC)=10V, Width=0.049inch
C12: library part CMP-2007-04708-2, "General Purpose Ceramic Capacitor, 0805, 10nF, 10%, X7R, 0.15, 16V", Capacitance=10nF, Case Code (Imperial)=0805, Case Code (Metric)=2012, Dielectric=X7R, Dielectric Material=Ceramic, Max Operating Temperature=125°C, Min Operating Temperature=-55°C, Package Quantity=4000, Tolerance=10%, Voltage Rating=16V, Case/Package=0805, Construction=Flat, Depth=1.25mm, Dissipation Factor=3.5%, Height=0.94mm, Lead Free="Lead Free", Length=2.01mm, Mount="Surface Mount", Number of Pins=2, Packaging="Tape and Reel", Radiation Hardening=No, REACH SVHC="No SVHC", RoHS Compliant=Yes, Termination=SMD/SMT, Thickness=0.037inch, Voltage Rating (DC)=16V, Width=0.049inch
D1 D3: library part CMP-44529-000024-1, "LED GREEN CLEAR CHIP SMD", Case Code (Imperial)=0603, Case Code (Metric)=1608, Color=Green, Forward Current=20mA, Forward Voltage=3.3V, Lens Color=Colorless, Max Operating Temperature=85°C, Min Operating Temperature=-40°C, Package Quantity=1, Case/Package=0603, Dominant Wavelength=525nm, Height=0.75mm, Illumination Color=Green, Lead Free="Lead Free", Length=1.6mm, Lens Transparency=Clear, Luminous Intensity=350mcd, Mount="Surface Mount", Packaging="Tape and Reel", Test Current=20mA, Viewing Angle=120°, Width=0.8mm
D2: library part CMP-2000-05787-2, "LED RED CLEAR CHIP SMD", Case Code (Imperial)=0402, Case Code (Metric)=1005, Color=Red, Forward Current=20mA, Forward Voltage=1.95V, Lens Color=Clear, Max Operating Temperature=85°C, Min Operating Temperature=-40°C, Package Quantity=2000, Case/Package=0402, Dominant Wavelength=630nm, Height=0.6mm, Illumination Color=Red, Lead Free="Lead Free", Length=1mm, Lens Style=Clear, Luminous Intensity=220mcd, Mount="Surface Mount", Number of LEDs=1, Number of Pins=2, Packaging="Tape and Reel", Test Current=20mA, Viewing Angle=120°, Wavelength=635nm, Width=0.5mm
FB1 FB2: library part CMP-0686-00554-8, "FERRITE BEAD 120 OHM 0603 1LN", Case Code (Imperial)=0603, Case Code (Metric)=1608, Current Rating=3A, DC Resistance (DCR)=30mR, Inductor Type="FERRITE BEAD", Max Operating Temperature=125°C, Min Operating Temperature=-55°C, Package Quantity=4000, Test Frequency=100MHz, Tolerance=25%, Case/Package=0603, Core Material=Ferrite, Depth=0.95mm, Height=0.8mm, Impedance=120R, Lead Free="Lead Free", Length=1.6mm, Material=Ferrite, Max Current Rating=3A, Max DC Current=3A, Number of Circuits=1, Number of Lines=1, Number of Pins=2, Packaging="Tape and Reel", REACH SVHC="No SVHC", RoHS Compliant=Yes, Series=BLM18K, Termination=SMD/SMT, Width=0.8mm
J: "USB - micro B USB 2.0 Receptacle Connector 5 Position Surface Mount, Right Angle", Package=None, Availability=Unavailable, MF="Global Connector Technology", MP=USB3080-30-00-A, Price=None, SnapEDA_Link=https://www.snapeda.com/parts/USB3080-30-00-A/Global%20Connector%20Technology/view-part/697012/?ref=snap
J1 J4: Package=None, Availability=Unavailable, Price=None
  J1: MF=Samtec, MP=SSW-110-03-T-S
  J4: MF="Samtec Inc.", MP=SSW-106-03-T-S
J2 J3: library part SSW-108-XX-X-S, "8 Position Receptacle Connector Through Hole, Right Angle", Package=None, Availability=Bad, Check_prices=https://www.snapeda.com/parts/SSW-108-03-F-S/Samtec/view-part/3433832/?ref=eda, MF=Samtec, MP=SSW-108-03-F-S, Price=None, Purchase-URL=https://pricing.snapeda.com/search/part/SSW-108-03-F-S/?ref=eda, SnapEDA_Link=https://www.snapeda.com/parts/SSW-108-03-F-S/Samtec/view-part/3433832/?ref=snap
J5: "SSW Series .100 Tiger Buyâ„¢ Socket Strip", Package=None, Availability="In Stock", Check_prices=https://www.snapeda.com/parts/SSW-103-03-T-D/Samtec/view-part/?ref=eda, MF=Samtec, MP=SSW-103-03-T-D, Price=None, Purchase-URL=https://pricing.snapeda.com/search/part/SSW-103-03-T-D/?ref=eda, SnapEDA_Link=https://www.snapeda.com/parts/SSW-103-03-T-D/Samtec/view-part/?ref=snap
J6 J7: library part CMP-02766-000562-1, "CONN HEADER VERT 4POS 2.54MM", Color=Black, Contact Resistance=15mR, Max Operating Temperature=105°C, Min Operating Temperature=-40°C, Connector Type="Male Pin", Contact Material=Brass, Contact Mating Length=0.185inch, Contact Plating=Gold, Depth=2.48mm, Gender=Male, Height=6.4mm, Housing Color=Black, Housing Material=Polymer, Length=29.64mm, Mount="Through Hole", Number of Contacts=4, Number of Positions=4, Number of Rows=1, Orientation=Straight, Packaging=Rail/Tube, Pitch=2.54mm, Radiation Hardening=No, Termination=Solder
J8: library part CMP-02766-001390-1, "CONN RCPT 8POS 0.1 GOLD SMD", Color=Black, Contact Resistance=10mR, Max Current Rating=6.9A, Max Operating Temperature=125°C, Max Voltage Rating (AC)=475V, Min Operating Temperature=-55°C, Connector Type=Receptacle, Contact Material=Bronze, Contact Plating=Gold, Contact Type="Female Socket", Depth=4.42mm, Gender=Female, Housing Color=Black, Housing Material=Polymer, Lead Free="Lead Free", Length=20.32mm, Mount="Surface Mount", Number of Contacts=8, Number of Positions=8, Number of Rows=1, Orientation=Straight, Packaging=Bulk, Pitch=2.54mm, Radiation Hardening=No, RoHS Compliant=Yes, Series=SSM, Termination=Solder, Width=2.54mm
R1 R2 R3: library part CMP-2000-03412-1, Manufacturer="Vishay Dale", Part Number=CRCW06034K70FKTA
R4 R6: library part CMP-13261-004965-1, "Res Thick Film 0402 330Ω 1% 0.063W ±100ppm/°C Molded SMD T/R", Case Code (Imperial)=0402, Case Code (Metric)=1005, Max Operating Temperature=155°C, Max Power Dissipation=63mW, Min Operating Temperature=-55°C, Package Quantity=1, Resistance=330R, Temperature Coefficient=100ppm/°C, Tolerance=1%, Case/Package=0402, Composition="Thick Film", Contact Plating=Tin, Depth=0.5mm, Features="Moisture Resistant", Height=0.016inch, Length=0.039inch, Military Standard=Not, Number of Terminations=2, Packaging="Tape and Reel", Power Rating=63mW, Radiation Hardening=No, Width=0.02inch
R5: library part CMP-2001-04374-6, "RES SMD 100 OHM 1% 1/8W 0805", Case Code (Imperial)=0805, Case Code (Metric)=2012, Max Operating Temperature=155°C, Max Power Dissipation=125mW, Min Operating Temperature=-55°C, Package Quantity=1, Resistance=100R, Resistance Tolerance=1%, Resistor Type="Thick Film", Temperature Coefficient=100ppm/°C, Voltage Rating=150V, Case/Package=0805, Construction=Rectangular, Contact Plating=Tin, Depth=1.25mm, Features="Automotive AEC-Q200", Height=0.6mm, Lead Free="Lead Free", Length=2mm, Military Standard=Not, Mount="Surface Mount", Number of Pins=2, Number of Terminations=2, Packaging="Tape and Reel", Power Rating=125mW, Radiation Hardening=No, REACH SVHC="No SVHC", RoHS Compliant=Yes, Series=ERJ, Size Code=0805, Technology="THICK FILM", Termination=SMD/SMT, Tolerance=1%, Voltage Rating (DC)=150V, Width=1.2mm
R7: library part CMP-1015-00655-2, Manufacturer="Vishay Dale", Part Number=CRCW121020K0FKTA
SW1 SW2: library part CMP-26316-000007-1, "SWITCH TACTILE SPST-NO 0.05A 42V", Case/Package=SMD/SMT, Current Rating=50mA, Max Operating Temperature=85°C, Max Voltage Rating (AC)=30V, Max Voltage Rating (DC)=42V, Min Operating Temperature=-40°C, Operating Force=1.8N, Package Quantity=450, Ratings=IP40, Actuator Material=Polyphenylene, Actuator Type=Standard, Contact Material=Gold, Depth=11.8mm, Illumination Type=Non-Illuminated, Length=11.4mm, Max Current Rating=50mA, Mechanical Life=1000000Cycles, Mount="Surface Mount", Orientation=Straight, Packaging="Tape and Reel", Radiation Hardening=No, RoHS Compliant=Yes, Series=SMS, Switch Function=Off-Mom, Switch Travel=0.35mm, Termination=J-Lead, Throw Configuration=SPST, Voltage Rating (AC)=30V, Voltage Rating (DC)=42V, Weight=0.028219oz
U1: library part CMP-0235-00048-1, "STM8L ARM-based EnergyLite 8-bit MCU, LCD, 32 kB Flash, 2 kB Internal RAM, -40 to +85°C Temperature, 48-pin LQFP, Tray", ComponentLink1Description="STM8L151/152,x4,x6 Datasheet", ComponentLink1URL=http://www.st.com/internet/com/TECHNICAL_RESOURCES/TECHNICAL_LITERATURE/DATASHEET/CD00240181.pdf, ComponentLink2Description="STM8L Family Web Page", ComponentLink2URL=http://www.st.com/internet/mcu/subclass/1381.jsp, ComponentLink3Description="st.com Home", ComponentLink3URL=http://www.st.com/internet/com/home/home.jsp, PackageDescription="48-Pin Low-Profile Quad Flat Pack, 7 x 7 mm Body, 0.5 mm Pitch (LQFP48)", PackageReference=LQFP48, PackageVersion="rev13, Apr-2011"
U2: library part CMP-209535-000001-1, "LDO Voltage Regulators 1A, 3.3V", Dropout Voltage=1.1V, Manufacturer="Advanced Monolithic Systems", Max Junction Temp=+125°C, Max Power Dissipation=1.2W, Max Supply Voltage=15V, Nominal Supply Current=5mA, Output Current=1A, Output Voltage=3.3V, Package=AMS1117, Temperature="-40°C to +125°C", Temperature Range Low=-40°C, Automotive=No, Category=IC, ComponentLink2Description=Datasheet, ComponentLink2URL=http://www.advanced-monolithic.com/pdf/ds1117.pdf, Device Class L1="Integrated Circuits (ICs)", Device Class L2="Power Management ICs", Device Class L3="Voltage Regulators - Linear", Height=1.8mm, Ipc Land Pattern Name=SOT229P700X180-4, Lead Free=Yes, Manufacturer Part Number=AMS1117-3.3, Number Of Outputs=1, Octopart=https://octopart.com/ams1117-3.3-advanced+monolithic+systems-25899300, Output Type=Fixed, RoHS=TRUE, Standoff Height=0.64mm, Temperature Range High=+125°C
U3: "Optical Sensor Ambient 550nm IÂ²C 6-SMD, No Lead", Package="SMD-6 Vishay Semiconductor", Availability="In Stock", Check_prices=https://www.snapeda.com/parts/VEML6030/Vishay+Semiconductor+Opto+Division/view-part/?ref=eda, MF=Vishay, MP=VEML6030, Price=None, Purchase-URL=https://pricing.snapeda.com/search/part/VEML6030/?ref=eda, SnapEDA_Link=https://www.snapeda.com/parts/VEML6030/Vishay+Semiconductor+Opto+Division/view-part/?ref=snap
U4: "1Â°C IÂ²C temperature sensor with performance upgrades to industry standard LM75 / TMP75", Package=None, Availability="In Stock", Check_prices=https://www.snapeda.com/parts/TMP1075NDRLR/Texas+Instruments/view-part/?ref=eda, MF="Texas Instruments", MP=TMP1075NDRLR, Price=None, Purchase-URL=https://pricing.snapeda.com/search/part/TMP1075NDRLR/?ref=eda, SnapEDA_Link=https://www.snapeda.com/parts/TMP1075NDRLR/Texas+Instruments/view-part/?ref=snap

## Free pads (board coordinates)
  round 3.175 hole 3.175: 2(13.97,2.54) 2(15.24,50.8) 2(66.04,7.62) 2(66.04,35.56)

## Via types
v1: diameter 1.27, hole 0.711, Top Layer to Bottom Layer, 26 vias

## Nets (pads, with @x,y where several pads share a name; then routed paths per layer and width w, separated by ;. In a path a pad name is that pad's centre, name@x,y a point inside that pad or via, vN(x,y) a via of type N, cw(c..) or ccw(c..) an arc to the next point about the centre after c; other vN are vias at no path point)
+3V3: C4.2 C5.2 C7.1 C8.2 C9.1 C12.2 J6.4 J7.4 R1.1 R2.1 R3.1 R4.2 R7.1 U1.10 U1.39 U2.2 U2.4 U3.6 U4.5 | length 205.3
  Top Layer w0.24: 48.825,35.275 U1.39
  Top Layer w0.254: J6.4 1.753,37.213 1.753,20.98 2.642,20.091 14.211,20.091 ; 13.977,19.857 14.211,20.091 ; 24.443,20.1 24.435,20.091 14.211,20.091 ; C7.1 31.623,30.398 ; R4.2 31.15,36.55 31.623,36.077 31.623,30.398 ; U4.5 39.475,30.306 39.218,30.048 37.677,30.048 ; v1(41.199,36.017) 42.082,36.9 R1.1 ; R3.1 40.336,41.2 v1(35.154,36.017) 35.154,30.861 35.616,30.398 ; U3.6 44.302,15.15 44.325,15.173 44.325,17.241 ; C8.2 44.325,17.241 ; v1(46.195,32.264) 47.8,33.869 C4.2 ; R7.1 45.491,16.075 ; v1(51.5,26.725) C12.2 ; 55.925,28.15 U1.10 ; 31.623,30.398 35.616,30.398 ; 35.616,30.398 35.966,30.048 37.677,30.048 ; 37.677,30.048 38.075,29.65 C9.1 37.862,28.562 37.862,13.738 38.997,12.603 43.946,12.603 44.806,13.462 44.806,15.389 45.491,16.075 ; 44.325,17.241 45.491,16.075
  Top Layer w0.3: 48.529,35.226 48.578,35.275 48.825,35.275 ; 55.925,28.15 55.925,27.879 55.929,27.875
  Top Layer w0.4: J7.4@2.8,7.02 4.87,7.02 13.977,16.127 13.977,19.857 ; R2.1 26.125,17.425 28.55,19.85 U2.4 ; 24.443,20.1 27.195,20.1 U2.4 ; C7.1 30.449,30.398 28.64,28.59 28.64,28.135 U2.2 U2.4 ; C4.2 47.8,34.926 48.1,35.226 48.529,35.226 ; C12.2 54.703,26.725 54.803,26.825 55.45,26.825 C5.2 55.929,27.304 55.929,27.875
  Bottom Layer w0.254: v1(35.154,36.017) v1(41.199,36.017) 43.757,36.017 43.777,36.037 48.225,36.037 48.512,36.325 52.164,36.325 52.326,36.487 53.148,36.487 55.012,34.623 55.012,31.288 53.035,29.312 48.913,29.312 ; v1(46.195,32.264) 46.195,32.03 48.913,29.312 ; v1(51.5,26.725) 48.913,29.312
+5V: C6.1 C11.1 FB1.1 U2.3 | length 18.2
  Top Layer w0.254: C11.1 17.306,24.575 15.65,24.575 15.401,24.824 FB1.1 25.633,27.45 26.228,28.045 U2.3 26.26,30.363 C6.1
B0: J8.1 U1.24 | length 13.4
  Top Layer w0.254: U1.24 58.293,36.275 58.293,36.779 62.814,41.3 62.814,45.101 63.84,46.126 J8.1
B1: J8.2 U1.25 | length 8.9
  Top Layer w0.254: U1.25 57.733,37.625 61.3,41.192 J8.2
B2: J8.3 U1.26 | length 10.7
  Top Layer w0.254: U1.26 56.425,38.772 58.76,41.107 J8.3
B3: J8.4 U1.27 | length 6.7
  Top Layer w0.254: U1.27 55.934,37.634 55.934,38.566 55.948,38.581 55.948,40.023 56.22,40.295 J8.4
B4: J8.5 U1.28 | length 10.5
  Top Layer w0.254: J8.5 53.68,44.671 55.425,42.926 U1.28
B5: J8.6 U1.29 | length 9.3
  Top Layer w0.254: J8.6 51.14,42.635 52.025,41.75 54.076,41.75 54.902,40.924 54.902,38.56 54.925,38.537 U1.29
B6: J8.7 U1.30 | length 14.2
  Top Layer w0.254: J8.7 48.6,41.91 49.768,40.742 53.155,40.742 54.425,39.472 U1.30
B7: J8.8 U1.31 | length 12.3
  Top Layer w0.254: J8.8 46.06,42.367 49.413,39.014 53.645,39.014 53.925,38.734 U1.31
GND: C1.2 C2.1 C3.1 C4.1 C5.1 C6.2 C7.2 C8.1 C9.2 C10.2 C11.2 C12.1 C13.2 D1.1 D2.1 D3.1 FB2.1 FB2.2 J6.2 J7.3 J.5 SW1.4 SW2.3 U1.9 U1.40 U2.1 U3.1 U3.4 U4.2 U4.4 | length 244.7
  Top Layer w0.254: J6.2 11.915,42.94 15.55,46.575 17.575,46.575 SW1.4 19.7,46.5 20.175,46.025 20.175,38.225 20.525,37.875 25.951,37.875 26.051,37.975 D1.1 ; J7.3 2.82,9.275 4.879,9.275 9.85,14.246 SW2.3 9.85,18.525 10.45,19.125 v1(11.8,19.125) ; J.5 7.428,25.497 10.05,22.875 11.631,22.875 C10.2 C10.2@11.751,22.919 ; C13.2 13.626,32.975 14.361,32.24 14.361,31.539 v1(14.475,31.425) ; v1(14.475,21.35) 14.464,21.361 13.309,21.361 C10.2@11.751,22.919 ; C11.2 17.35,22.919 C10.2@11.751,22.919 ; v1(21.06,10.665) 21.06,8.69 C1.2 28.5,8.625 29.825,9.95 31.225,9.95 D2.1 31.25,12.775 30.8,13.225 30.8,14.075 D3.1 30.875,28.01 U2.1 35.395,28.045 36.1,28.75 37.25,28.75 C9.2 37.275,27.975 36.825,27.525 v1(36.825,20.875) ; 26.001,37.875 26.001,35.212 26.25,34.963 C6.2 ; C7.2 30.65,31.9 v1(30.65,33.35) ; v1@37.1,31.1 38.74,31.1 38.772,31.068 38.947,31.068 38.975,31.04 U4.4 ; v1(39.225,33.7) 39.475,33.45 U4.2 ; v1(41.275,33.225) 42.325,33.225 v1(44.175,35.075) 45.6,35.075 C4.1 ; 41.525,15.15 U3.1 42.473,15.127 42.71,15.127 43.052,14.785 43.052,14.398 43.6,13.85 U3.4 ; v1(42.35,20.95) 42.35,18.825 C8.1 42.35,18.775 42.35,17.8 v1(43.2,16.95) ; U1.40 54.926,34.775 55.425,34.276 U1.9 ; C12.1 53.519,25.219 53.775,24.963 v1(53.775,23.275)
  Top Layer w0.5: C6.2 26.263,31.838 30.587,31.838 C7.2 ; C12.1@53.519,25.219 C5.1@55.656,25.219 ; C5.1@55.762,25.113 55.762,23.012 FB2.1 ; C5.1@55.763,25.113 57.713,25.113 C3.1 ; FB2.2 57.446,23 57.725,23.279 C3.1 ; C2.1 59.737,25.087 57.738,25.087 C3.1
  Bottom Layer w0.254: J7.3@2.8,9.56 3.905,10.665 v1(21.06,10.665) ; v1(11.8,19.125) 13.125,19.125 14.475,20.475 v1(14.475,31.425) ; v1(30.65,33.35) 32.85,31.15 v1(37.1,31.15) 37.1,33.826 37.249,33.975 40.525,33.975 v1(41.275,33.225) ; v1@36.863,20.912 42.312,20.912 v1(42.35,20.95) 52.6,20.95 53.775,22.125 v1(53.775,23.275) ; v1(40.925,15.475) 42.206,16.756 43.006,16.756 v1(43.2,16.95) ; v1(44.175,35.075) 44.319,35.219 52.371,35.219 v1(52.515,35.363)
INT: R7.2 U1.43 U3.3 | length 39
  Top Layer w0.254: v1(39.425,13.825) 39.45,13.85 U3.3 ; v1(47.225,12.15) 47.225,13.15 R7.2 49.901,13.375 50.05,13.524 50.05,19.225 47.2,22.075 47.2,30.278 48.554,31.632 48.554,32.829 48.992,33.266 50.066,33.266 U1.43
  Bottom Layer w0.254: v1(39.425,13.825) 39.425,12.498 39.773,12.15 v1(47.225,12.15)
NetC2_2: C2.2 C3.2 U1.11 U1.12 | length 8.1
  Top Layer w0.2: U1.11 56.444,29.406 56.444,28.231 56.65,28.025 ; U1.12 56.944,29.406 56.944,28.231 57.05,28.125
  Top Layer w0.3: 56.65,28.025 56.65,27.845 56.725,27.77 56.725,27.541 56.9,27.366 ; 57.05,28.125 57.125,28.05 57.549,28.05 57.725,27.874 57.725,27.7
  Top Layer w0.4: 56.9,27.366 57.459,27.366 C3.2 57.725,27.7
  Top Layer w0.5: C3.2 57.738,27.088 59.737,27.088 C2.2
NetC10_1: C10.1 FB1.2 J.1 | length 12.3
  Top Layer w0.254: J.1 7.028,28.097 10.594,24.531 C10.1 13.776,24.531 13.925,24.68 13.925,27.374 FB1.2
NetC13_1: C13.1 SW1.1 U1.2 | length 53.9
  Top Layer w0.254: C13.1 10.125,33.823 10.363,34.061 10.658,34.061 ; SW1.1 10.15,34.57 10.658,34.061 ; v1(15.425,34) 15.364,34.061 10.658,34.061 ; U1.2 51.934,29.434 51.934,30.508 53.034,31.609 v1@53.859,31.609
  Bottom Layer w0.254: v1(15.425,34) 29.94,34 30.177,34.237 30.252,34.312 35.673,34.312 35.793,34.431 38.596,34.431 38.827,34.662 39.623,34.662 39.854,34.431 41.429,34.431 41.747,34.113 47.492,34.113 47.742,34.363 52.689,34.363 52.757,34.431 53.554,34.431 53.748,34.237 54.312,33.673 54.312,32.337 v1(54.05,32.075)
NetD1_2: D1.2 R4.1 | length 1.5
  Top Layer w0.254: D1.2 28.825,38.025 R4.1
NetD2_2: D2.2 R5.1 | length 1.8
  Top Layer w0.254: D2.2 33.9,9.975 R5.1
NetD3_2: D3.2 R6.1 | length 2
  Top Layer w0.254: D3.2 32.55,14.175 R6.1
NetR2_2: R2.2 SW2.1 | length 4.1
  Top Layer w0.254: SW2.1 17.775,16.175 R2.2
NRST: J6.1 SW1.2 | length 8.2
  Top Layer w0.254: J6.1 6.405,45.48 7.425,46.5 SW1.2
RX: J7.2 U1.41 | length 56.9
  Top Layer w0.254: v1(42.64,29.015) 44.54,29.015 48.1,32.575 48.1,33.375 48.992,34.266 50.066,34.266 U1.41
  Bottom Layer w0.254: J7.2@2.8,12.1 25.725,12.1 v1(42.64,29.015)
SCL: R1.2 U1.38 U3.5 U4.1 | length 34.7
  Top Layer w0.254: U3.5 43.655,14.5 43.506,14.649 43.506,14.981 42.637,15.85 42.025,15.85 40.875,17 40.875,32.186 40.726,32.335 U4.1 39.975,32.51 40.003,32.538 40.151,32.538 40.3,32.687 40.3,34.453 40.843,34.997 42.568,34.997 43.609,36.037 44.251,36.037 44.4,36.186 R1.2 47.592,36.9 48.717,35.775 U1.38
SDA: R3.2 U1.37 U3.2 U4.6 | length 43.3
  Top Layer w0.254: U3.2 40.843,14.5 40.83,14.513 40.187,14.513 39.525,15.175 39.525,29.714 39.957,30.146 39.957,30.847 U4.6 39.975,31.344 39.696,31.623 38.199,31.623 38.05,31.772 38.05,36.602 40.744,39.297 43.287,39.297 44.275,40.284 R3.2 45.7,41.2 50.075,36.825 U1.37
SWIM: J6.3 U1.1 | length 98.1
  Top Layer w0.254: U1.1 51.416,29.416 51.416,28.307 50.4,27.291 50.4,24.403 53.853,20.95 59.592,20.95 59.741,21.099 v1(59.741,21.99)
  Bottom Layer w0.254: J6.3 4.775,40.4 6.925,42.55 61.159,42.55 61.308,42.401 61.308,24.683 59.741,23.116 v1(59.741,21.99)
TX: J7.1 U1.42 | length 61.3
  Top Layer w0.254: U1.42 52.175,33.775 52.481,33.469 v1(53.156,33.469)
  Bottom Layer w0.254: J7.1@2.8,14.64 26.365,14.64 45,33.275 v1@53.156,33.275
U_LED1: R6.2 U1.47 | length 39.9
  Top Layer w0.254: R6.2 36.4,14.175 39.387,11.188 51.035,11.188 51.396,11.549 51.396,19.879 48.228,23.047 48.228,30.664 48.83,31.266 50.066,31.266 U1.47
U_LED2: R5.2 U1.48 | length 39.5
  Top Layer w0.254: R5.2 36.325,9.95 37.7,9.95 53.076,9.95 53.225,10.099 53.225,20 49.746,23.479 49.746,30.754 49.767,30.775 U1.48
User_Button: C1.1 SW2.2 U1.20 | length 70.5
  Top Layer w0.254: SW2.2 17.375,6.625 C1.1 55.3,6.625 61.275,12.6 61.275,33.2 60.225,34.25 60.175,34.25 60.15,34.275 U1.20
pads on no net: J1.01 J1.02 J1.03 J1.04 J1.05 J1.06 J1.07 J1.08 J1.09 J1.10 J2.01 J2.02 J2.03 J2.04 J2.05 J2.06 J2.07 J2.08 J3.01 J3.02 J3.03 J3.04 J3.05 J3.06 J3.07 J3.08 J4.01 J4.02 J4.03 J4.04 J4.05 J4.06 J5.01 J5.02 J5.03 J5.04 J5.05 J5.06 J. J.2 J.3 J.4 J.6 J.7 J.8 J.9 SW1.3 SW2.4 U1.3 U1.4 U1.5 U1.6 U1.7 U1.8 U1.13 U1.14 U1.15 U1.16 U1.17 U1.18 U1.19 U1.21 U1.22 U1.23 U1.32 U1.33 U1.34 U1.35 U1.36 U1.44 U1.45 U1.46 U4.3

## Polygon pours and split planes (outlines as drawn)
GND on Bottom Layer "GND_L02_P001" (solid, pour order 1): 0,53.34 64.516,53.34 64.516,53.167 66.04,51.643 66.04,40.386 68.58,37.846 68.58,5.08 66.04,2.54 66.04,0 0,0
GND on Top Layer "GND_L01_P002" (solid, pour order 2): 0,53.34 64.516,53.34 66.04,51.816 66.04,40.386 68.58,37.846 68.58,5.08 66.04,2.54 66.04,0 0,0

## Keep-outs
Keep-Out Layer:
  the board outline again, w0.254

## Silkscreen, mask and mechanical layers (free items; w line width, h text height)
Top Overlay:
  text "Arduino Leonardo Temperature Shield" at 23.125,45.175 h1.1
  text "Made by:            Patryk Zymelka" at 23.25,41.575 h0.8

## Text inside footprints (layer, text, board x,y; h text height)
J: Mechanical 13 "PCB Edge" at 0.761,32.513 h0.67 r270